# EAGLE board ATtinyProgrammer (EAGLE 7.3.0)
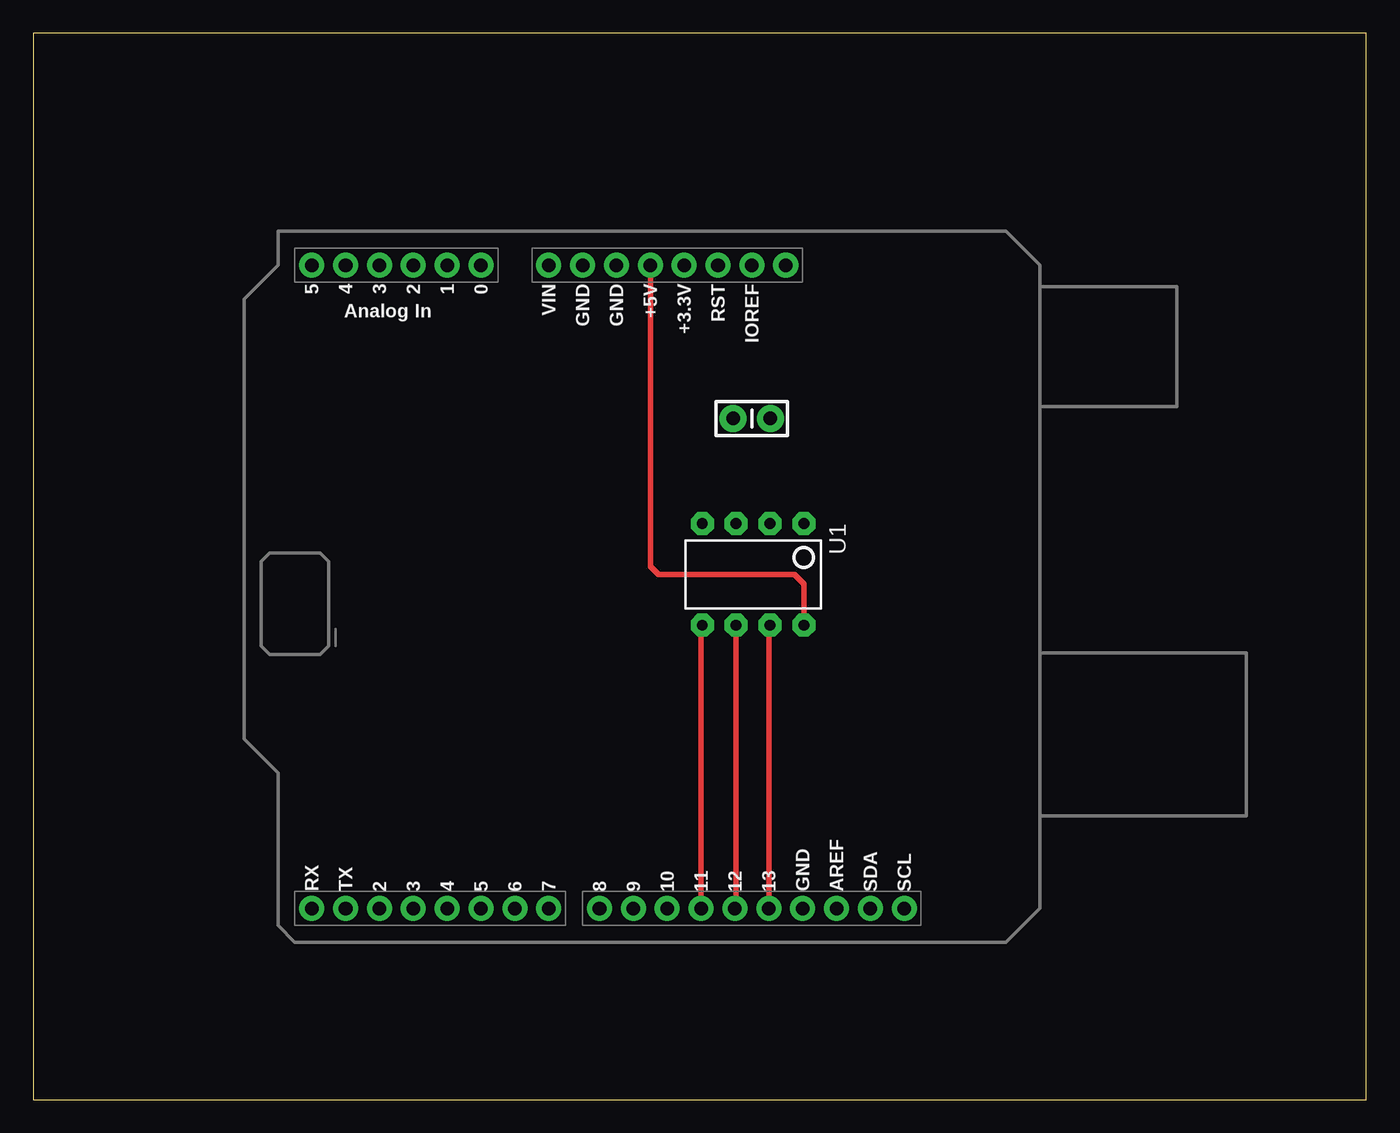
[diagram p0: board, top side]
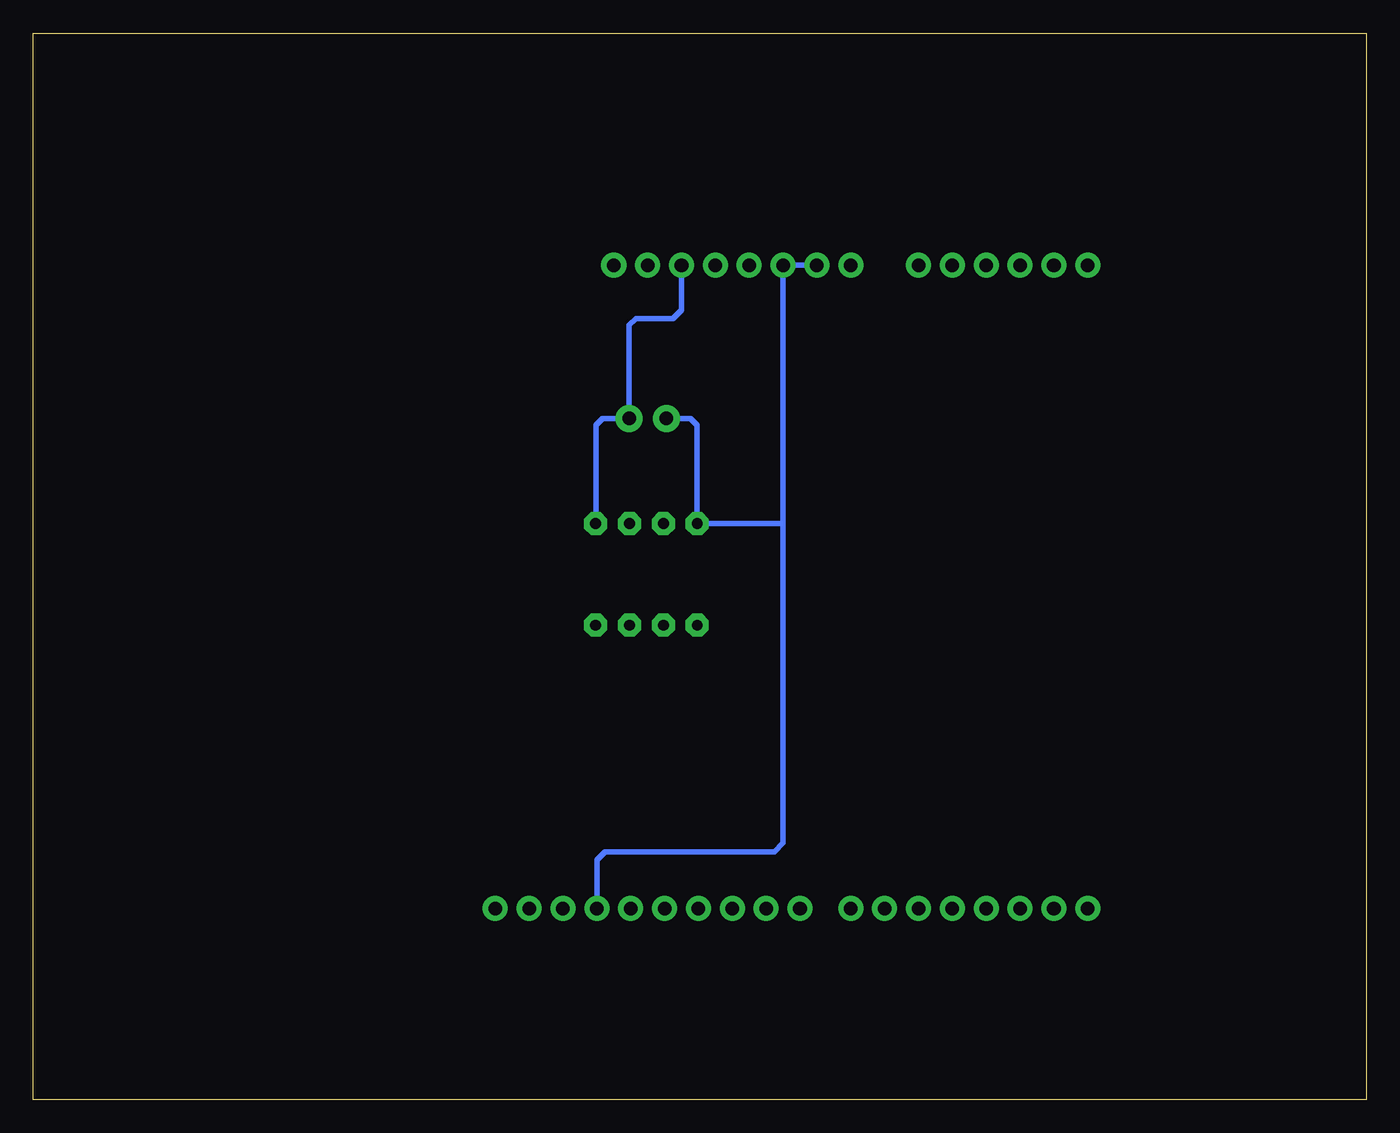
[diagram p1: board, bottom side, seen from below]

Size 100 x 80 mm. Coordinates in mm from the lower left corner, seen from the top.
Outline: 0,0 100,0 100,80 0,80 0,0
Copper layers (1*16): Top 0.035mm / dielectric 1.5mm / Bottom 0.035mm
Design rules "default *": minimum track width 10mil, minimum drill 24mil, track to track 8mil, track to pad 8mil, pad to pad 8mil, via to via 8mil, smd to smd 8mil, copper to edge 0mil, drill to drill 8mil, minimum pad ring 10mil, minimum via ring 8mil, stop-mask expansion 4mil, vias tented up to drill 0mil, thermal gap 0mil

## Footprints (pad centres in the part's own frame; a part is rotated, then mirrored left to right if it is on the bottom)
CAP-PTH-SMALL-KIT = drill 1.016 pad 2.032: 1 -1.397,0; 2 1.397,0
UNO_R3_SHIELD = drill 1.016 pad 1.88: 3.3V 50.8,26.67; 5V 50.8,29.21; A0 50.8,41.91; A1 50.8,44.45; A2 50.8,46.99; A3 50.8,49.53; A4 50.8,52.07; A5 50.8,54.61; AREF 2.54,15.24; D2 2.54,49.53; D3 2.54,46.99; D4 2.54,44.45; D5 2.54,41.91; D6 2.54,39.37; D7 2.54,36.83; D8 2.54,33.02; D9 2.54,30.48; D10 2.54,27.94; D11 2.54,25.4; D12 2.54,22.86; D13 2.54,20.32; GND@0 50.8,31.75; GND@1 50.8,34.29; GND@2 2.54,17.78; IOREF 50.8,21.59; NC 50.8,19.05; RES 50.8,24.13; RX 2.54,54.61; SCL 2.54,10.16; SDA 2.54,12.7; TX 2.54,52.07; VIN 50.8,36.83
DIP08 = drill 0.813 pad 1.727 octagon: 1 -3.81,-3.81; 2 -1.27,-3.81; 3 1.27,-3.81; 4 3.81,-3.81; 5 3.81,3.81; 6 1.27,3.81; 7 -1.27,3.81; 8 -3.81,3.81

## Placement (x,y rotation side)
C1  10uF  [CAP-PTH-SMALL-KIT]  53.9,51.1 180 top
J1  ARDUINO_R3_SHIELD  [UNO_R3_SHIELD]  75.5,11.8 90 top
U1  TINY85-20-DIP  [DIP08]  54,39.4 180 top

## Library data of the parts
C1 = SparkFun-Capacitors; PROD_ID: CAP-08370
J1 = SparkFun-Boards
U1 = SparkFun-DigitalIC; PROD_ID: IC-09445

## Nets
GND: C1.2 J1.GND@0 J1.GND@1 J1.GND@2 U1.4
MISO: J1.D12 U1.6
MOSI: J1.D11 U1.5
RES: C1.1 J1.RES U1.1
RESET: J1.D10
SCK: J1.D13 U1.7
VCC: J1.5V U1.8

## Tracks (layer width: path | path; a pad name or v marks a point on that pad's centre or on a via)
GND
  Bottom 0.406: C1.2 50.7,51.1 50.2,50.6 U1.4 43.86,43.21 43.75,43.1 | J1.GND@1 J1.GND@0 43.75,43.1 | 43.75,43.1 43.75,19.25 44.4,18.6 57.1,18.6 57.7,18 57.7,14.36 J1.GND@2
MISO
  Top 0.406: U1.6 52.73,14.43 J1.D12
MOSI
  Top 0.406: J1.D11 50.1,35.5 U1.5
RES
  Bottom 0.406: U1.1 57.8,50.6 57.3,51.1 C1.1 55.3,58.1 54.8,58.6 52,58.6 51.37,59.23 J1.RES
SCK
  Top 0.406: J1.D13 55.18,35.5 U1.7
VCC
  Top 0.406: J1.5V 46.29,40.01 46.9,39.4 57.1,39.4 57.8,38.7 U1.8